# EAGLE board DQ542MA ESP32 (EAGLE 9.4.2)
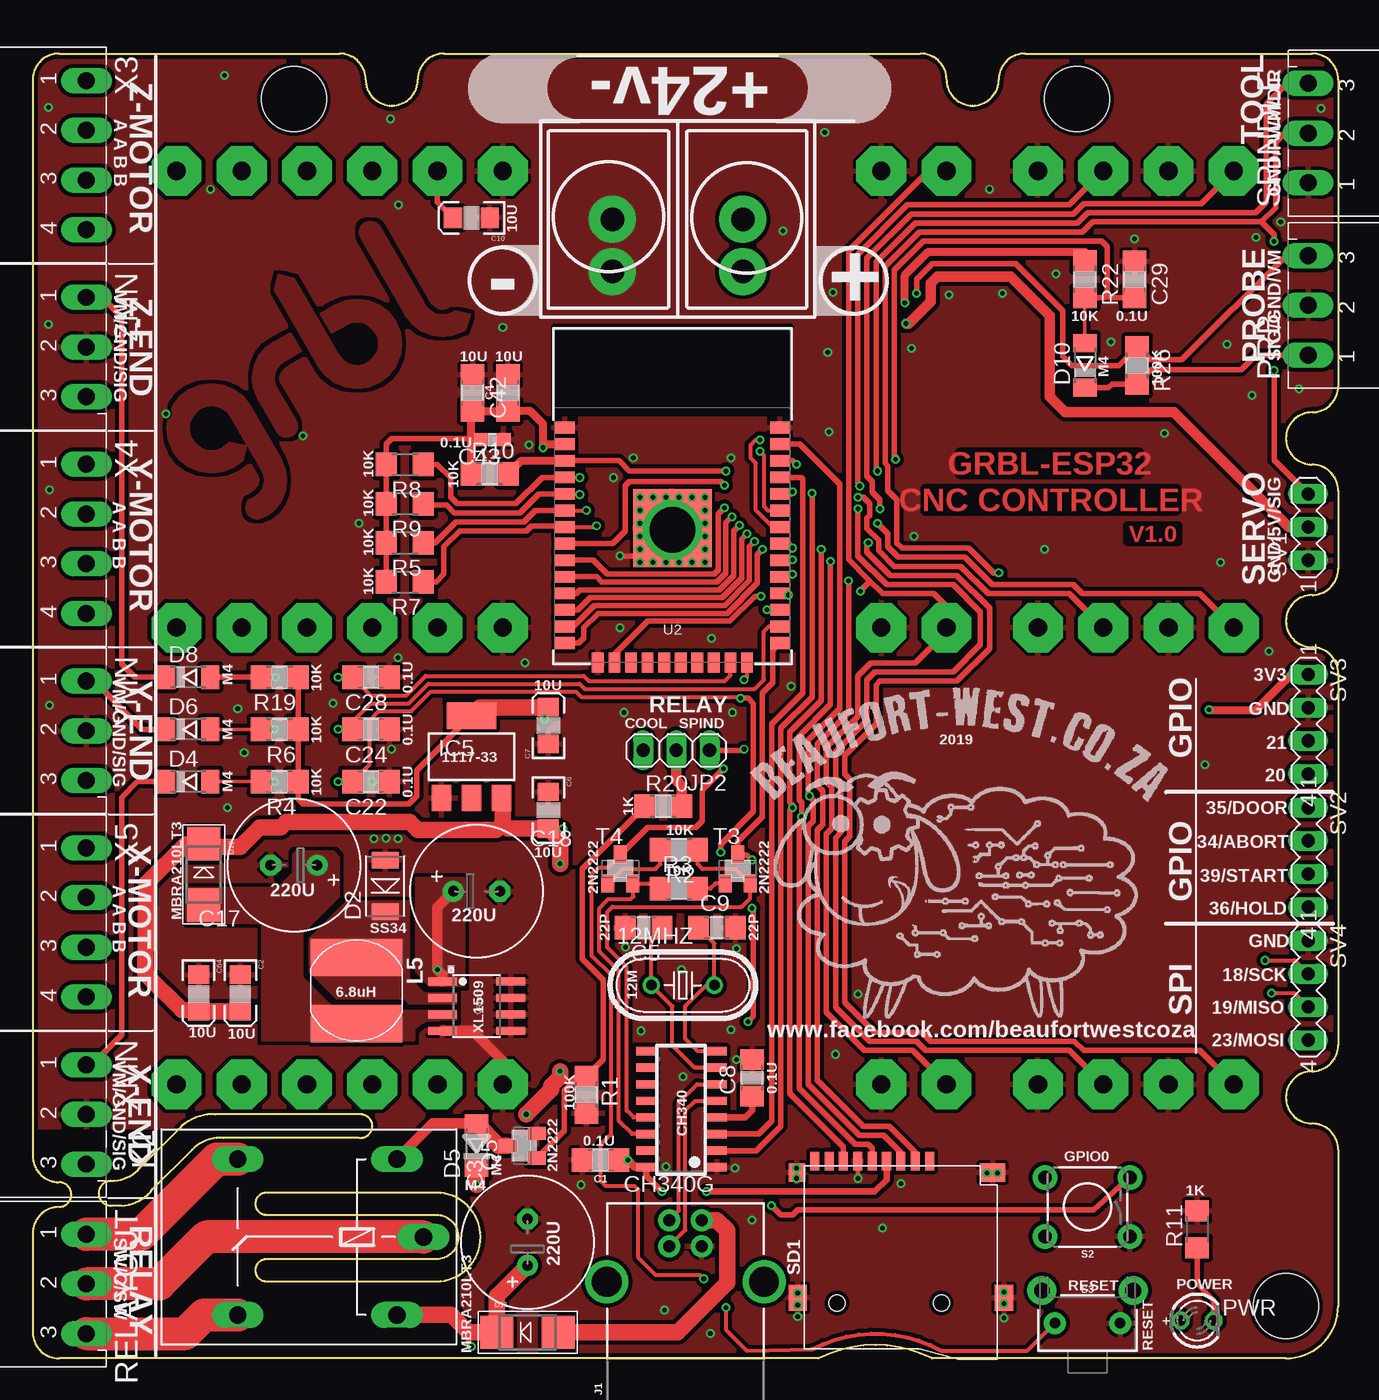
[diagram p0: board, top side]
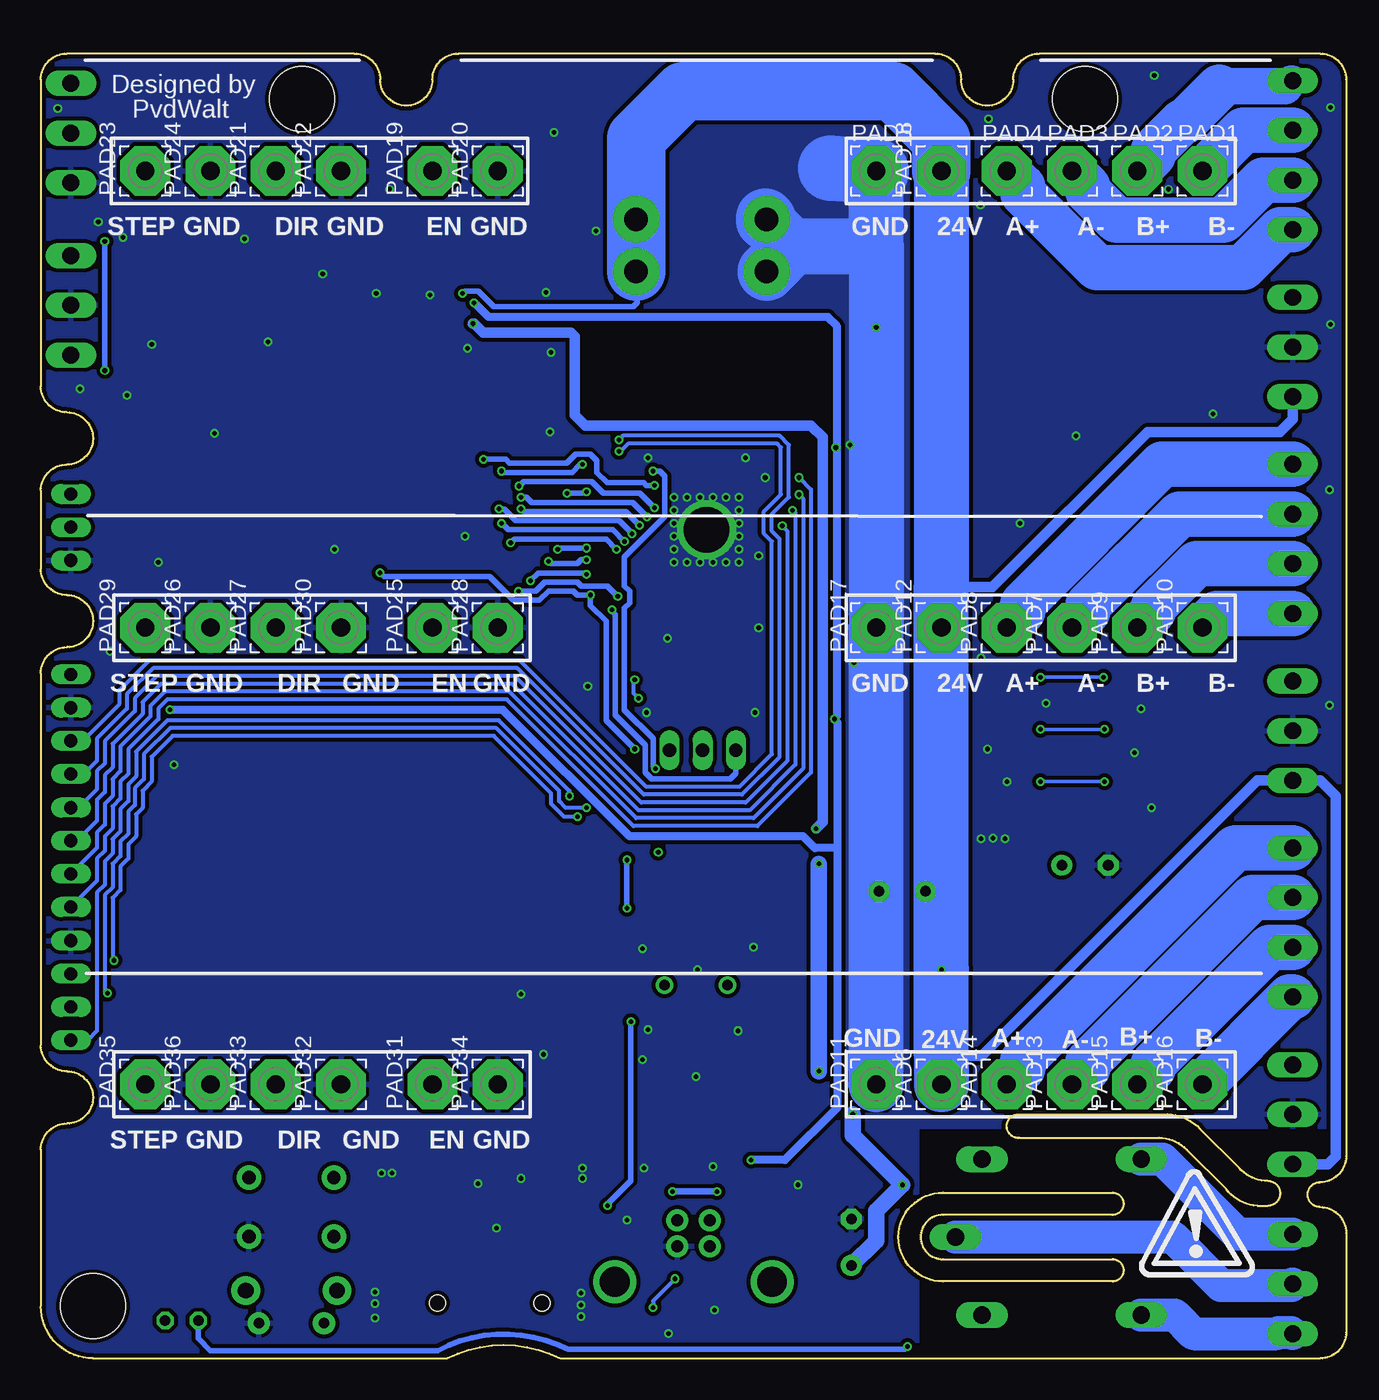
[diagram p1: board, bottom side, seen from below]

Size 100 x 100 mm. Coordinates in mm from the lower left corner, seen from the top.
Outline: 100,98 100,74.5 arc-90 98,72.5 arc90 96,70.5 arc90 98,68.5 arc-90 100,66.5 100,60.5 arc-90 98,58.5 arc90 96,56.5 arc90 98,54.5 arc-90 100,52.5 100,24 arc-90 98,22 arc90 96,20 arc90 98,18 arc-90 100,16 100,4 arc-90 96,0 68.9,0 arc54 60.2,0 2,0 arc-90 0,2 0,9.6 arc-90 2,11.6 arc180 2,13.5 arc-90 0,15.5 0,98 arc-90 2,100 23.5,100 arc-90 25.5,98 arc90 27.5,96 arc90 29.5,98 arc-90 31.5,100 68,100 arc-90 70,98 arc90 72,96 arc90 74,98 arc-90 76,100 98,100 arc-90 100,98
Outline: 17.9,12.7 arc180 17.9,11 30.9,11 arc-180 30.9,7.6 17.9,7.6 arc180 17.9,5.9 30.9,5.9 arc180 30.9,12.7 17.9,12.7
Outline: 6,13.6 arc180 6,11.7 6.8,11.7 arc50 9.2,13 12.2,16 arc-50 14.6,16.9 25,16.9 arc180 25.2,18.7 14,18.7 arc50 11.2,17.6 8.2,14.6 arc-50 6,13.6
Copper layers (1*16): Top 0.035mm / dielectric 1.5mm / Bottom 0.035mm
Design rules "dirt_cheap_dirty_boards.v1": minimum track width 5mil, minimum drill 12mil, track to track 5mil, track to pad 5mil, pad to pad 5mil, via to via 5mil, smd to smd 0mil, copper to edge 10mil, drill to drill 10mil, minimum pad ring 10mil, minimum via ring 6mil, stop-mask expansion 2mil, vias tented up to drill 25mil, thermal gap 10mil
Net classes: 1 power: width 0.6 mm, clearance 0.305 mm; 5 3.3-Amp Class: width 1.27 mm
Holes 5 mm at 20,96.5 80,96.5 96,4
tRestrict: area 40,72.5 to 58,79
bRestrict: area 40,72.5 to 58,79

## Footprints (pad centres in the part's own frame; a part is rotated, then mirrored left to right if it is on the bottom)
HC49U70 = drill 0.813: 1 -2.413,0; 2 2.413,0
1206 = smd 1.6 x 1.8: 1 -1.4,0; 2 1.4,0
EIA3216 = smd 1.4 x 1.6: A 1.4,0; C -1.4,0
E3,5-10 = drill 0.813 pad 1.6: + -1.778,0 | drill 0.813 pad 1.6 octagon: - 1.778,0
C1206 = smd 1.6 x 1.8: 1 -1.4,0; 2 1.4,0
C0603 = smd 1.1 x 1: 1 -0.85,0; 2 0.85,0
DO-214AC = smd 1.27 x 2.1: 1 -1.98,0; 2 1.98,0
SOD80C = smd 1.4 x 1.8: A 1.7,0; C -1.7,0
SOD80 = smd 1.4 x 1.8: 1 -1.7,0; 2 1.7,0
SMADIODE = smd 2.54 x 2.54: A 2.349,0; C -2.349,0
SOT223 = smd 1.5 x 2: 1 -2.3,-3.15; 2 0,-3.15; 3 2.3,-3.15 | smd 3.8 x 2: 4 0,3.15
USB-B-PTH = drill 0.914 pad 1.676: D+ 4,1.25; D- 5.981,1.25; GND 4,-1.25; VBUS 5.981,-1.25 | drill 2.286: SHLD1 1.282,-6.02; SHLD2 1.282,6.02
1X03 = drill 1.016 long: 1 -2.54,0; 2 0,0; 3 2.54,0
G5LE = drill 1.321 long: 1 -7.493,-5.969; 2 -7.493,5.969; O 4.699,5.969; P -9.525,0; S 4.699,-5.969
CD75 = smd 7 x 2.85: 1 0,2.54; 2 0,-2.54
3,81/1,4 = drill 1.397 pad 3.81 octagon: 1 0,0
MC1.5/3-G-3.81 = drill 1.3 long: 1 -3.81,8; 2 0,8; 3 3.81,8
LED3MM = drill 0.813 octagon: A -1.27,0; K 1.27,0
SOT23-BEC = smd 1 x 1.4: B -0.95,-1.1; C 0,1.1; E 0.95,-1.1
R1206 = smd 1.6 x 1.803: 1 -1.422,0; 2 1.422,0
TACTILE_SWITCH_PTH_6.0MM = drill 1.016 pad 1.88: 1 -3.251,2.261; 2 3.251,2.261; 3 -3.251,-2.261; 4 3.251,-2.261
TACTILE_SWITCH_PTH_RIGHT_ANGLE_KIT = drill 0.8 pad 1.7: 1 -2.5,0; 2 2.5,0 | drill 1.2 pad 2.2: ANCHOR1 -3.5,2.5; ANCHOR2 3.5,2.5
TF-PULL = smd 0.7 x 1.4: 1 -2.2,-7.62; 2 -1.1,-7.62; 3 0,-7.62; 4 1.1,-7.62; 5 2.2,-7.62; 6 3.3,-7.62; 7 4.4,-7.62; 8 5.5,-7.62; 9 6.6,-7.62 | smd 1.4 x 2: S1 -7.9,2.85; S2 7.9,2.85 | smd 1.28 x 1.4: S3 7.96,-6.75 | smd 1.95 x 1.4: S4 -7.025,-6.75 | hole 1.25: -3.1,3.25; 4.9,3.25
MA03-1 = drill 1.016 long: 1 -2.54,0; 2 0,0; 3 2.54,0
MA04-1 = drill 1.016 long: 1 -3.81,0; 2 -1.27,0; 3 1.27,0; 4 3.81,0
ESP-WROOM-32-NARROW = smd 0.9 x 1.5: 1 6.43,8.238; 2 5.16,8.238; 3 3.89,8.238; 4 2.62,8.238; 5 1.35,8.238; 6 0.08,8.238; 7 -1.19,8.238; 8 -2.46,8.238; 9 -3.73,8.238; 10 -5,8.238; 11 -6.27,8.238; 12 -7.54,8.238; 13 -8.81,8.238; 14 -10.08,8.238; 25 -10.08,-8.238; 26 -8.81,-8.238; 27 -7.54,-8.238; 28 -6.27,-8.238; 29 -5,-8.238; 30 -3.73,-8.238; 31 -2.46,-8.238; 32 -1.19,-8.238; 33 0.08,-8.238; 34 1.35,-8.238; 35 2.62,-8.238; 36 3.89,-8.238; 37 5.16,-8.238; 38 6.43,-8.238 | smd 1.5 x 0.9: 15 -11.57,5.715; 16 -11.57,4.445; 17 -11.57,3.175; 18 -11.57,1.905; 19 -11.57,0.635; 20 -11.57,-0.635; 21 -11.57,-1.905; 22 -11.57,-3.175; 23 -11.57,-4.445; 24 -11.57,-5.715 | smd 6 x 6: GND -1.27,0
SOIC16 = smd 0.635 x 1.524: 1 -4.445,-2.695; 2 -3.175,-2.695; 3 -1.905,-2.695; 4 -0.635,-2.695; 5 0.635,-2.695; 6 1.905,-2.695; 7 3.175,-2.695; 8 4.445,-2.695; 9 4.445,2.695; 10 3.175,2.695; 11 1.905,2.695; 12 0.635,2.695; 13 -0.635,2.695; 14 -1.905,2.695; 15 -3.175,2.695; 16 -4.445,2.695
SO08 = smd 0.61 x 2.21: 1 -1.905,-2.616; 2 -0.635,-2.616; 3 0.635,-2.616; 4 1.905,-2.616; 5 1.905,2.616; 6 0.635,2.616; 7 -0.635,2.616; 8 -1.905,2.616
MC1.5/4-G-3.81 = drill 1.3 long: 1 -9.525,8; 2 -5.715,8; 3 -1.905,8; 4 1.905,8

## Placement (x,y rotation side)
12MHZ  12MHZ  [HC49U70]  49.8,28.6 0 top
C1  1.0uF  [1206]  43.5,15.2 180 top
C2  10uF  [EIA3216]  15.9,28 270 top
C3  220u 16v  [E3,5-10]  37.9,8.9 90 top
C4  10uF  [1206]  36.4,74 90 top
C5  22P  [C1206]  46.8,33 180 top
C6  10uF  [EIA3216]  39.5,42 270 top
C7  10uF  [EIA3216]  39.5,48.5 90 top
C8  0.1U  [C1206]  55.1,21.5 90 top
C9  22P  [C1206]  52.4,33 0 top
C10  10uF  [EIA3216]  33.6,87.4 180 top
C17  220u 16v  [E3,5-10]  20,37.8 180 top
C18  470u 50v electrolytic  [E3,5-10]  34,35.8 0 top
C22  0.1uF  [C1206]  25.9,44.2 180 top
C24  0.1uF  [C1206]  25.9,48.2 180 top
C28  0.1uF  [C1206]  25.9,52.2 180 top
C29  0.1uF  [C1206]  84.4,82.7 270 top
C42  10uF 50V  [C1206]  33.7,74 270 top
C43  0.1uF 50V  [C0603]  35.2,70.4 180 top
C64  10uF  [EIA3216]  12.7,28 270 top
D2  SS34  [DO-214AC]  27,36.2 90 top
D4  1N4148WS-SOD323  [SOD80C]  11.9,44.2 0 top
D5  M4  [SOD80]  34,16.3 90 top
D6  1N4148WS-SOD323  [SOD80C]  11.9,48.2 0 top
D8  1N4148WS-SOD323  [SOD80C]  11.9,52.2 0 top
D10  1N4148WS-SOD323  [SOD80C]  80.6,76.1 90 top
D11  MBRA210LT3  [SMADIODE]  37.9,2 0 top
D12  MBRA210LT3  [SMADIODE]  13.1,37.1 270 top
IC5  1117-33  [SOT223]  33.6,46.1 0 top
J1  USB_B_PTH  [USB-B-PTH]  50,4.6 90 top
JP2  [1X03]  49.3,46.6 180 top
K2  [G5LE]  20.4,9.3 180 top
L5  68uH  [CD75]  24.8,28.2 180 top
PAD1  [3,81/1,4]  11,91 0 bottom
PAD2  [3,81/1,4]  16,91 0 bottom
PAD3  [3,81/1,4]  21,91 0 bottom
PAD4  [3,81/1,4]  26,91 0 bottom
PAD5  [3,81/1,4]  36,91 0 bottom
PAD6  [3,81/1,4]  31,21 90 bottom
PAD7  [3,81/1,4]  21,56 90 bottom
PAD8  [3,81/1,4]  26,56 90 bottom
PAD9  [3,81/1,4]  16,56 90 bottom
PAD10  [3,81/1,4]  11,56 90 bottom
PAD11  [3,81/1,4]  36,21 90 bottom
PAD12  [3,81/1,4]  31,56 90 bottom
PAD13  [3,81/1,4]  21,21 90 bottom
PAD14  [3,81/1,4]  26,21 90 bottom
PAD15  [3,81/1,4]  16,21 90 bottom
PAD16  [3,81/1,4]  11,21 90 bottom
PAD17  [3,81/1,4]  36,56 90 bottom
PAD18  [3,81/1,4]  31,91 90 bottom
PAD19  [3,81/1,4]  70,91 90 bottom
PAD20  [3,81/1,4]  65,91 90 bottom
PAD21  [3,81/1,4]  82,91 90 bottom
PAD22  [3,81/1,4]  77,91 90 bottom
PAD23  [3,81/1,4]  92,91 90 bottom
PAD24  [3,81/1,4]  87,91 90 bottom
PAD25  [3,81/1,4]  70,56 90 bottom
PAD26  [3,81/1,4]  87,56 90 bottom
PAD27  [3,81/1,4]  82,56 90 bottom
PAD28  [3,81/1,4]  65,56 90 bottom
PAD29  [3,81/1,4]  92,56 90 bottom
PAD30  [3,81/1,4]  77,56 90 bottom
PAD31  [3,81/1,4]  70,21 90 bottom
PAD32  [3,81/1,4]  77,21 90 bottom
PAD33  [3,81/1,4]  82,21 90 bottom
PAD34  [3,81/1,4]  65,21 90 bottom
PAD35  [3,81/1,4]  92,21 90 bottom
PAD36  [3,81/1,4]  87,21 90 bottom
PRB  Phoenix Pluggable 3.81mm 3 way  [MC1.5/3-G-3.81]  105.7,80.7 90 top
PWR  [LED3MM]  89.2,2.9 0 top
Q5  BC849SMD  [SOT23-BEC]  37.5,16.3 90 top
R1  100K  [R1206]  42.4,20.2 270 top
R2  10k  [R1206]  49.5,39 180 top
R3  10k  [R1206]  49.5,36 0 top
R4  10k  [R1206]  18.9,44.2 180 top
R5  10k  [R1206]  28.5,62.5 180 top
R6  10k  [R1206]  18.9,48.2 180 top
R7  10k  [R1206]  28.5,59.5 180 top
R8  10k  [R1206]  28.5,68.5 180 top
R9  10k  [R1206]  28.5,65.5 180 top
R10  10k  [R1206]  35,67.8 0 top
R11  1K  [R1206]  89.2,9.9 90 top
R19  10k  [R1206]  18.9,52.2 180 top
R20  1K  [R1206]  48.3,42.3 0 top
R22  10k  [R1206]  80.6,82.7 270 top
R26  100k  [R1206]  84.6,76.1 270 top
RELAYOUT  Phoenix Pluggable 3.81mm 3 way  [MC1.5/3-G-3.81]  -3.9,5.7 270 top
S2  MOMENTARY-SWITCH-SPST-PTH-6.0MM  [TACTILE_SWITCH_PTH_6.0MM]  80.8,11.6 180 top
S3  MOMENTARY-SWITCH-SPST-PTH-RIGHT-ANGLE-KIT  [TACTILE_SWITCH_PTH_RIGHT_ANGLE_KIT]  80.8,2.7 0 top
SD1  TF-HOLDER  [TF-PULL]  66.5,7.5 180 top
SPINDLE  Phoenix Pluggable 3.81mm 3 way  [MC1.5/3-G-3.81]  105.7,93.9 90 top
SV1  [MA03-1]  97.7,63.7 90 top
SV2  [MA04-1]  97.7,38.4 270 top
SV3  [MA04-1]  97.7,48.6 270 top
SV4  [MA04-1]  97.7,28.2 270 top
T3  [SOT23-BEC]  54,37.5 0 top
T4  [SOT23-BEC]  45,37.5 0 top
U2  ESP-WROOM-32NARROW  [ESP-WROOM-32-NARROW]  49,64.9 90 top
U$2  CH340G  [SOIC16]  49.7,19.1 90 top
VREG1  XL1509  [SO08]  34,27 270 top
X3  Phoenix Pluggable 3.81mm 4 way  [MC1.5/4-G-3.81]  -3.9,88.4 270 top
X4  Phoenix Pluggable 3.81mm 4 way  [MC1.5/4-G-3.81]  -3.9,59 270 top
X5  Phoenix Pluggable 3.81mm 4 way  [MC1.5/4-G-3.81]  -3.9,29.6 270 top
XMN  Phoenix Pluggable 3.81mm 3 way  [MC1.5/3-G-3.81]  -3.9,18.7 270 top
YMN  Phoenix Pluggable 3.81mm 3 way  [MC1.5/3-G-3.81]  -3.9,48.1 270 top
ZMN  Phoenix Pluggable 3.81mm 3 way  [MC1.5/3-G-3.81]  -3.9,77.5 270 top

## Library data of the parts
12MHZ = crystal; OC_FARNELL: unknown; OC_NEWARK: unknown
C1 = SparkFun-Capacitors; PROD_ID: CAP-09822
C2 C6 C7 C10 C64 = SparkFun
C3 C5 C8 C9 C17 C18 C22 C24 C28 C29 = rcl
C4 = SparkFun-Capacitors; PROD_ID: CAP-10057
C42 C43 R2-R9 R19 R22 R26 = resistor
D2 = dp_devices
D4 D6 D8 D10 = diode
D5 = semicon-smd-ipc
D11 D12 = microbuilder
IC5 = v-reg
J1 = SparkFun-Connectors; PROD_ID: CONN-08278; SF_ID: PRT-00139
JP2 = pinhead
K2 = relay; OC_FARNELL: unknown; OC_NEWARK: unknown
L5 = rc-master-smd
PAD1-PAD36 = wirepad
PRB RELAYOUT SPINDLE X3-X5 XMN YMN ZMN = jt-con-phoenix-3.81
PWR = led
Q5 = transistor-npn
R1 R10 R11 R20 = adafruit
S2 = SparkFun-Switches; PROD_ID: SWCH-08441; SF_SKU: COM-00097
S3 = SparkFun-Switches; PROD_ID: CONN-10672; SF_SKU: COM-10791
SD1 = sd-mmc
SV1-SV4 = con-lstb; OC_FARNELL: unknown; OC_NEWARK: unknown
T3 T4 = transistor
U2 = SparkFun-RF; PROD_ID: IC-13849
U$2 = usb-serial
VREG1 = Cohesion_parts

## Nets
0: S2.3 T3.C U2.25
3.3V: C1.1 C4.1 C7.A C42.2 C43.2 IC5.4 R4.1 R5.2 R6.1 R7.2 R8.2 R9.2 R10.1 R19.1 R22.1 SD1.4 SV3.1 U2.2 U$2.16
5_SS_SD: SD1.2 U2.29
5V: C2.A C3.+ C6.A C64.A D5.1 D11.C D12.C IC5.3 K2.2 PWR.A SV1.2
5V-REG: C17.+ D12.A L5.1 VREG1.3
18_SCLK: SD1.5 SV4.2 U2.30
19_MISO: SD1.7 SV4.3 U2.31
20: SV3.4 U2.32
21: SV3.3 U2.33
23_MOSI: SD1.3 SV4.4 U2.37
24V: C10.A C18.+ PAD6.1 PAD12.1 PAD18.1 PRB.3 R26.1 VREG1.1 XMN.3 YMN.3 ZMN.3
C: K2.P RELAYOUT.2
CHIP_PU: R10.2 S3.1 T4.C U2.3
COIL-: D5.2 K2.1 Q5.C
COOLANT_16: JP2.3 U2.27
CYCLESTART_39: R9.1 SV2.3 U2.5
D+: J1.D+ U$2.5
D-: J1.D- U$2.6
DOOR_35: R7.1 SV2.1 U2.7
DTR: R2.1 T3.E U$2.13
ENABLE_13: PAD19.1 PAD25.1 PAD31.1 U2.16
FEEDHOLD_36: R8.1 SV2.4 U2.4
GND: C1.2 C2.C C3.- C4.2 C5.2 C6.C C7.C C8.2 C9.2 C10.C C17.- C18.- C22.1 C24.1 C28.1 C29.1 C42.1 C43.1 C64.C D2.2 IC5.1 J1.GND PAD5.1 PAD11.1 PAD17.1 PAD20.1 PAD22.1 PAD24.1 PAD26.1 PAD28.1 PAD30.1 PAD32.1 PAD34.1 PAD36.1 PRB.2 Q5.E R1.2 R11.2 S2.1 S3.2 SD1.6 SD1.S1 SD1.S2 SD1.S3 SD1.S4 SPINDLE.1 SV1.1 SV3.2 SV4.1 U2.1 U2.15 U2.38 U2.GND U$2.1 VREG1.4 VREG1.5 VREG1.6 VREG1.7 VREG1.8 XMN.2 YMN.2 ZMN.2
N$2: R2.2 T4.B
N$3: R3.2 T3.B
N$6: PAD10.1 X4.4
N$8: PAD8.1 X4.1
N$9: 12MHZ.1 C5.1 U$2.7
N$10: PAD7.1 X4.2
N$11: 12MHZ.2 C9.1 U$2.8
N$13: PAD2.1 X3.1
N$14: PAD1.1 X3.2
N$15: PAD14.1 X5.1
N$16: PAD13.1 X5.2
N$18: PWR.K R11.1
N$32: PAD4.1 X3.4
N$35: PAD3.1 X3.3
N$38: PAD9.1 X4.3
N$40: PAD16.1 X5.4
N$42: Q5.B R1.1 R20.1
N$43: PAD15.1 X5.3
N$292: D2.1 L5.2 VREG1.2
NC: K2.S RELAYOUT.1
NO: K2.O RELAYOUT.3
PROBE_32: C29.2 D10.A R22.2 U2.8
PROBE_HV: D10.C PRB.1 R26.2
RELAY: JP2.2 R20.2
RESET/ABORT_34: R5.1 SV2.2 U2.6
RTS: R3.1 T4.E U$2.14
RX: U2.35 U$2.3
SPINDLE_17: JP2.1 SPINDLE.2 SV1.3 U2.28
SPINDLE_EN_22: SPINDLE.3 U2.36
TX: U2.34 U$2.2
V3: C8.1 U$2.4
VUSB: D11.A J1.VBUS
X_MIN_2: C22.2 D4.A R4.2 U2.24
X_MIN_HV: D4.C XMN.1
XDIR_26: PAD33.1 U2.11
XSTEP_12: PAD35.1 U2.14
Y_MIN_4: C24.2 D6.A R6.2 U2.26
Y_MIN_HV: D6.C YMN.1
YDIR_25: PAD27.1 U2.10
YSTEP_14: PAD29.1 U2.13
Z_MIN_15: C28.2 D8.A R19.2 U2.23
Z_MIN_HV: D8.C ZMN.1
ZDIR_33: PAD21.1 U2.9
ZSTEP_27: PAD23.1 U2.12

## Tracks (layer width: path | path; a pad name or v marks a point on that pad's centre or on a via)
0  (via drill 0.35)
  Top 0.406: U2.25 56.7,54.28 56.7,51.8 55.9,51 55.9,41.5 54,39.6 T3.C 54.7,38.6 v55.1,38.2 | v55.1,34.5 55.2,34.4 55.2,26.2 v54.8,25.8 | v56.6,11.7 57.3,11 58.2,11 58.6,11.4 81.29,11.4 S2.3
  Bottom 0.406: v55.1,38.2 v55.1,34.5 | v54.8,25.8 54.8,13.6 56.6,11.8 v56.6,11.7
3.3V  (via drill 0.35)
  Top 0.305: U$2.16
  Top 0.406: 80.52,84.2 R22.1 | IC5.4 29.4,45.05 29.4,43.1 28.8,42.5 20.7,42.5 20.32,42.88 R4.1 R6.1 R19.1 | 33.58,70.5 27.5,70.5 27.08,70.08 R8.2 R9.2 R5.2 R7.2
  Top 0.508: SD1.4 65.4,13.7 64.5,12.8 v51.6,12.8 | v48.2,12.8 47,14 U$2.16
  Top 0.61: U$2.16 46.15,14.65 v45.6,15.2 C1.1 | C7.A 39.2,49.6 v39.2,49 | U2.2 39.36,70.06 v39.1,69.8 39.1,71.6 38.1,72.6 C4.1 C42.2 33.58,72.48 33.58,70.5 33.58,70.3 | R10.1 33.58,70.3 | C43.2 34.25,70.3 33.58,70.3 | v66.8,80.9 66.8,83 68.6,84.8 80.6,84.8 80.6,84.28 80.52,84.2 | v90.1,49.7 93.7,49.7 96.41,52.41 SV3.1
  Top 1.27: IC5.4 34.25,49.9 C7.A
  Bottom 0.508: v51.6,12.8 v48.2,12.8
  Bottom 0.61: v45.6,15.2 43,15.2 39,19.2 39,39.1 | 39,39.1 39,48.8 v39.2,49 39,49.2 39,69.7 v39.1,69.8 39,69.9 39,79.1 39.7,79.8 65.7,79.8 v66.8,80.9 | 39,39.1 40.7,39.1 41.6,40 54.9,40 64.6,49.7 v90.1,49.7
5_SS_SD  (via drill 0.35)
  Top 0.406: SD1.2 67.6,15.8 65.6,17.8 63.6,17.8 60.1,21.3 60.1,40.5 60.5,40.9 60.5,43.5 60.1,43.9 60.1,47.1 62.5,49.5 v62.5,59.6 | v58.2,60.1 57.44,60.1 U2.29
  Bottom 0.406: v58.2,60.1 58.3,60.2 61.9,60.2 v62.5,59.6
5V  (via drill 0.35)
  Top 0.406: C6.A v40.6,40.6 | v33.6,0.9 33.4,1.1 33.4,2
  Top 0.813: v66.9,79.3 67.1,79.3 68.8,81 68.8,82.4 69.3,82.9 74.9,82.9 77.9,79.9 77.9,73.7 79.1,72.5 87.4,72.5 96.2,63.7 SV1.2
  Top 1.27: 13.05,39.4 D12.C | 13.05,39.4 11.7,39.4 8.69,36.39 8.62,29.48 11.4,26.7 11.5,26.7 C64.A C2.A | 13.05,39.4 13.25,39.2 15.9,39.2 17.4,40.7 19,40.7 19.42,41.12 28.88,41.12 29.5,40.5 35.5,40.5 36,41 | K2.2 32.07,3.33 33.4,2 34.7,2 34.8,2.1 35.45,2.1 D11.C 35.55,4.77 C3.+ | D5.1 v34,13.3 | 36,41 36,42.85 IC5.3 | 36,41 36.4,40.6 C6.A 40.4,39.7 v40.4,37.9 | v40.4,22 40.4,21.57 39.73,20.9 39.73,20.64 v37.8,18.7
  Bottom 0.406: PWR.A 87.93,1.53 87,0.6 69.6,0.6 arc55 59.6,0.7 33.8,0.7 v33.6,0.9
  Bottom 0.813: v40.6,40.6 40.1,41.1 40.1,70.6 41,71.5 58.3,71.5 59.1,72.3 59.1,78.3 59.4,78.6 66.1,78.6 66.8,79.3 v66.9,79.3
  Bottom 1.27: v40.4,37.9 v40.4,22 | v37.8,18.7 37.8,17.1 v34,13.3 36,11.3 36,9.02 C3.+
5V-REG
  pour Top (isolate 0.406, no thermals): 32.4,26.6 23.2,26.6 20.6,29.2 20.6,32.6 23.4,35.4 23.4,38.4 23,38.8 20.2,38.8 20,38.6 20,37.2 18.8,36 11.9,36 11.8,35.9 11.8,33.6 12,33.4 17.6,33.4 17.6,24.4 29.2,24.4 29.2,25.2 29.8,25.8 32.4,25.8
18_SCLK  (via drill 0.35)
  Top 0.305: v94.4,30.5 96.67,30.5 SV4.2
  Top 0.406: SD1.5 64.3,16.1 64,16.4 63,16.4 58.7,20.7 58.7,41.1 58.9,41.3 v58.9,41.5 58.9,42.6 58.7,42.8 58.7,47.7 61.1,50.1 v61.1,61.1 | U2.30 58.17,61.17 v58.2,61.2
  Bottom 0.305: v58.9,41.5 59.9,41.5 60.9,42.5 60.9,43.3 65.3,47.7 89.9,47.7 91.5,46.1 91.5,44.2 92.2,43.5 92.2,42.2 92.7,41.7 92.7,40 93.3,39.4 93.3,38.3 93.9,37.7 93.9,35.9 94.5,35.3 94.5,30.6 v94.4,30.5
  Bottom 0.406: v58.2,61.2 58.6,61.2 58.9,60.9 60.9,60.9 v61.1,61.1
19_MISO  (via drill 0.35)
  Top 0.305: v94.9,28 96.63,28 SV4.3
  Top 0.406: SD1.7 62.1,16.2 58,20.3 58,42 v58.2,42.2 58.2,42.4 58,42.6 58,48 60.4,50.4 v60.4,62 | U2.31 57.86,62.44 v58.2,62.1
  Bottom 0.305: v58.2,42.2 59.8,42.2 60.3,42.7 60.3,43.5 65.1,48.3 90.1,48.3 92.1,46.3 92.1,44.4 92.8,43.7 92.8,42.4 93.3,41.9 93.3,40.2 93.9,39.6 93.9,38.5 94.5,37.9 94.5,36.1 95.1,35.5 95.1,28.2 v94.9,28
  Bottom 0.406: v60.4,62 60.3,62.1 v58.2,62.1
20  (via drill 0.35)
  Top 0.305: U2.32 56.69,63.71 55.4,65 55.4,68.6 55,69 55,70 55.4,70.4 v55.7,70.4
  Bottom 0.305: v55.7,70.4 55.4,70.7 43.4,70.7 42.7,70 42.7,66 44,64.7 44,63.4 43.4,62.8 43.4,46.1 46.3,43.2 53.8,43.2 63.5,52.9 91.4,52.9 93.4,50.9 93.4,49.8 95.7,47.5 95.7,45.8 96.71,44.79 SV3.4
21  (via drill 0.35)
  Top 0.305: v55.7,69.5 56,69.2 56,65.3 56.32,64.98 U2.33
  Bottom 0.305: v55.7,69.5 55.6,69.5 55,70.1 43.6,70.1 43.3,69.8 43.3,66.2 44.6,64.9 44.6,63.2 44,62.6 44,46.3 46.5,43.8 53.6,43.8 63.3,53.5 91.7,53.5 94,51.2 94,50.1 96.77,47.33 SV3.3
23_MOSI  (via drill 0.35)
  Top 0.406: SD1.3 66.5,15.8 65.2,17.1 63.3,17.1 59.4,21 59.4,40.8 59.8,41.2 59.8,42.8 v59.5,43.1 59.4,43.2 59.4,47.4 61.8,49.8 61.8,67 58.74,70.06 U2.37
  Bottom 0.305: v59.5,43.1 59.5,43.5 64.9,48.9 90.3,48.9 92.7,46.5 92.7,44.6 93.3,44 93.3,42.7 93.9,42.1 93.9,40.4 94.5,39.8 94.5,38.7 95.1,38.1 95.1,36.3 95.7,35.7 95.7,25.1 96.41,24.39 SV4.4
24V  (via drill 0.35, 1.8 pad 3.6)
  Top 0.406: PRB.3 97.59,84.4 95.9,84.4 88.02,76.52 85.6,76.52 R26.1 83.18,76.1 79.6,76.1 78.9,76.8 78.9,80.3 75.3,83.9 68.9,83.9 67.7,82.7 v67.7,81.6 | C10.A 31,88.6 PAD18.1
  Top 0.813: VREG1.1 31.38,29.42 v31,29.8 31,34.58 C18.+
  Bottom 0.406: v67.7,81.6 67.5,81.8 66.5,81.8 65.3,80.6 54.6,80.6 54.3,80.9 54.3,83.2 v54.4,83.3
  Bottom 0.813: ZMN.3 4.1,72 5.1,71 15.2,71 27.1,59.1 30.85,59.1 31,59.25 | 31,23.2 27.9,23.2 6.81,44.29 YMN.3 1.99,44.29 0.8,43.1 0.8,15.5 1.41,14.89 XMN.3
  Bottom 4.2: PAD6.1 31,23.2 v31,29.8 PAD12.1 31,59.25 PAD18.1
  Bottom 4.5: PAD18.1 31,93.4 34.7,97.1 50.8,97.1 54.4,93.5 v54.4,87.3 v54.4,83.3
  pour Top (isolate 0.406, no thermals): 33,28.6 30.4,28.6 29.4,29.6 29.4,36.8 33,36.8
C
  Top 2.54: K2.P 13.3,9.3 9.7,5.7 RELAYOUT.2
  Bottom 2.54: K2.P 13.3,9.3 9.6,5.6 4.2,5.6 RELAYOUT.2
CHIP_PU  (via drill 0.35)
  Top 0.305: T4.C 44,37.6 43.3,37.6 42.8,37.1 42.8,30.9 44.3,29.4 44.3,17.2 43.5,16.4 43.5,13.6 43.9,13.2 46.1,13.2 46.4,12.9 46.4,7.7 47.7,6.4 51.1,6.4 v51.4,6.1 | v53.1,3.9 53.1,2.2 54.7,0.6 59.7,0.7 arc-57 69.6,0.6 76.2,0.6 S3.1
  Top 0.406: U2.3 44.91,68.79 45.7,68 v53.1,68 | v52.91,45.19 51.3,43.58 51.3,41.2 50.8,40.7 47.1,40.7 T4.C
  Top 0.61: R10.2 37.41,68.79 U2.3
  Bottom 0.305: v51.4,6.1 53.1,4.4 v53.1,3.9
  Bottom 0.406: v53.1,68 52.6,68 52.2,67.6 52.2,64.5 55.3,61.4 55.3,59.2 54.9,58.8 54.9,57.9 55.3,57.5 55.3,49.7 53.1,47.5 53.1,45.38 v52.91,45.19
COIL-
  Top 0.813: D5.2 30.62,18 K2.1
  Top 1.27: Q5.C 35.7,16.3 D5.2
COOLANT_16  (via drill 0.35)
  Top 0.406: v56.24,57.36 U2.27
  Bottom 0.406: v56.24,57.36 56.24,57.26 56,57.02 56,49.3 53.7,47 53.7,44.9 53.2,44.4 47.2,44.4 46.76,44.84 JP2.3
CYCLESTART_39  (via drill 0.35)
  Top 0.305: U2.5 41.85,66.25 v41.9,66.2
  Top 0.406: U2.5 38.75,66.25 37.3,64.8 32.3,64.8 31.7,65.4 30.02,65.4 R9.1
  Bottom 0.305: v41.9,66.2 41.6,65.9 41.6,45.2 45.4,41.4 54.4,41.4 64.1,51.1 90.5,51.1 91.6,50 91.6,49.2 93.9,46.9 93.9,45 94.5,44.4 94.5,43.1 95.1,42.5 95.1,40.9 95.7,40.3 95.7,39.13 SV2.3
D+
  Top 0.305: J1.D+ 50,9.85 50,19 50.73,19.73 U$2.5
D-
  Top 0.305: J1.D- 49.5,11.33 49.5,19.61 50.89,21 U$2.6
DOOR_35  (via drill 0.35)
  Top 0.305: U2.7 43.11,63.71 v43.2,63.8
  Top 0.406: R7.1 30.9,59.5 31.5,60.1 31.5,62.2 32.7,63.4 37.8,63.4 38.2,63.8 40.67,63.8 U2.7
  Bottom 0.305: v43.2,63.8 42.8,63.4 42.8,45.8 46,42.6 54,42.6 63.7,52.3 91.1,52.3 92.8,50.6 92.8,49.6 95.1,47.3 95.1,45.6 95.7,45 95.7,43.6 97.09,42.21 SV2.1
DTR
  Top 0.305: U$2.13 46.03,18.46 45.5,19 45.5,30 44,31.5 44,34.2 44.4,34.6 54.3,34.6 54.95,35.25 T3.E 53.85,37.5 51.3,37.5 50.92,37.88 R2.1
ENABLE_13  (via drill 0.35)
  Top 0.406: PAD31.1 67.4,23.6 63.7,23.6 60.8,26.5 60.8,40.2 61.2,40.6 61.2,43.8 60.8,44.2 60.8,46.8 63.2,49.2 63.2,52.3 64.2,53.3 67.6,53.3 70,55.7 PAD25.1 70,57.6 69,58.6 65.1,58.6 64.05,59.65 | 64.05,59.65 62.5,61.2 62.5,84.9 68.6,91 PAD19.1 | v63.4,58.8 64.05,59.45 64.05,59.65 | v55.8,58.4 55.3,58.4 53.4,56.5 47.1,56.5 44.55,53.95 U2.16
  Bottom 0.406: v55.8,58.4 56.6,59.2 58.6,59.2 58.9,59.5 61.4,59.5 62.1,58.8 v63.4,58.8
FEEDHOLD_36  (via drill 0.35)
  Top 0.305: U2.4 41.88,67.52 v41.9,67.5
  Top 0.406: R8.1 31,68.5 32,67.5 32,66 32.5,65.5 37,65.5 39.02,67.52 U2.4
  Bottom 0.305: v41.9,67.5 41,66.6 41,44.9 45.1,40.8 54.6,40.8 64.3,50.5 90.3,50.5 91,49.8 91,49 93.3,46.7 93.3,44.8 93.9,44.2 93.9,42.9 94.5,42.3 94.5,40.6 95.1,40 95.1,38.9 95.7,38.3 95.7,36.59 SV2.4
GND  (via drill 0.35, 1.8 pad 3.6, 3.5)
  Top 0.305: SD1.6 v63.2,13.8
  Top 0.406: U2.GND 49,61.5 v45,61.5
  Top 0.508: v53.9,22.9 C8.2 | SD1.S3 58.5,14.29 v58.5,14.6 | v73.9,14.2 73.85,14.25 SD1.S4 | SD1.S1 74.5,4.75 74.5,5 v74.4,5.1 | SD1.S2 v58.6,5
  Top 0.813: VREG1.4 33.7,25.09 36,22.8 PAD11.1
  Bottom 4.2: PAD11.1 PAD17.1 36,85.2 PAD5.1
  Bottom 4.3: 36,85.2 42.5,85.2 44.5,87.2
  Bottom 4.5: 44.5,87.4 v44.4,87.3 44.5,87.2 | 42.5,85.2 v44.4,83.3
  Bottom 5: PAD5.1 39.5,91.2
  other vias: 27.07,39.88 26.15,39.83 27.98,39.84 25.98,44.2 1.21,95.85 1.19,79.25 1.29,66.55 1.29,50.04 57.47,86.4 25,64 27.48,46.7 27.98,53.7 46.5,61 47.5,61 48.5,61 49.5,61 50.5,61 51.5,61 51.5,62 51.5,63 51.5,64 51.5,65 51.5,66 50.5,66 49.5,66 48.5,66 47.5,66 46.5,66 46.5,65 46.5,64 46.5,63 46.5,62 49,63.5 44.5,67.5 46,69 67.5,63 52,55.2 45.3,49.5 14.9,42.2 15.7,49.8 16.2,46.4 23,50.2 28,88.4 27.4,95 61.3,81.7 82.6,77.9 84.4,85.8 63.2,27.9 61.5,23.3 51.9,1.9 48.4,3.7 42,13.3 53.8,14.6 93.4,73.8 97,74.3 86.7,70.9 60.9,77.1 70.2,81.5 73.3,89.6 73.1,14.2 74.4,4.2 58.6,4.1 58.5,13.8 78.4,83.1 38,70 36,79 66.5,13.4 94.7,54.2 13.6,89.6 53.9,31.4 45.4,31.5 49.7,29.8 45,56 37.7,53.3 55.1,10.6 58.6,3.2 74.4,3.1 65.1,10 58.1,51.5 67.3,77.4 74.3,81.6 95.6,87.1 98.7,95.8 49.8,21.6 46.6,25.1 53.5,25.2 48.5,14.7 93.7,85.9 91.5,77.7 60.67,93.95 77.5,62 91,61 53.5,69 61,71 14.7,98.3 10.2,72.4 20.7,70.7 53.6,49.5 89.8,45.5
  pour Bottom (isolate 0.305, rank 6): 0,100 100,100 100,0 32.9,0 32.9,17.8 0,17.8
  pour Top (isolate 0.305, rank 6): 0,100 100,100 100,0 32.92,0 32.92,17.74 0,17.74
N$1
  pour Top: 17.87,64.54 17.51,64.39 17.31,64.34 17.11,64.33 16.91,64.37 16.72,64.46 16.57,64.59 16.44,64.76 16.36,64.95 16.33,65.15 16.35,65.35 16.41,65.55 16.52,65.72 16.66,65.86 17.02,66.01 17.33,66.25 17.56,66.55 17.71,66.91 17.76,67.29 17.71,67.68 17.56,68.04 15.19,72.14 14.92,72.5 14.56,72.78 14.14,72.95 13.69,73.01 13.25,72.95 12.83,72.78 12.47,72.5 12.2,72.14 12.03,71.73 11.97,71.28 12.03,70.83 12.2,70.42 12.47,70.06 12.83,69.78 13.25,69.61 13.69,69.55 14.14,69.61 14.56,69.78 14.92,70.06 15.03,70.2 16.34,69.94 16.12,68.86 15.95,68.73 15.41,68.31 15.12,68.19 14.58,67.97 13.69,67.86 13.18,67.92 12.81,67.97 11.98,68.31 11.27,68.86 10.73,69.57 10.39,70.39 10.27,71.28 10.39,72.17 10.73,72.99 11.27,73.7 11.98,74.25 12.81,74.59 13.69,74.7 14.58,74.59 15.41,74.25 16.12,73.7 16.66,72.99 19.03,68.88 19.35,68.12 19.46,67.29 19.35,66.47 19.03,65.71 18.53,65.05
N$2
  Top 0.305: T4.B 45.15,37.5 47.7,37.5 48.08,37.88 R2.2
N$3
  Top 0.305: T3.B 52.3,36.4 51.9,36 R3.2
N$5
  pour Top: 18.71,74.37 20.17,71.84 20.25,71.64 20.28,71.43 20.25,71.21 20.17,71.01 20.04,70.84 19.86,70.71 19.66,70.62 19.45,70.59 19.23,70.62 19.03,70.71 18.86,70.84 18.73,71.01 17.19,73.67 16.91,74.42 16.82,75.23 16.95,76.03 17.29,76.77 17.8,77.4 18.46,77.88 19.74,78.62 20.57,77.17 19.17,76.36 18.88,76.12 18.66,75.82 18.52,75.46 18.49,75.09 18.55,74.72
N$6
  Bottom 3.5: X4.4 9.9,57.09 PAD10.1
N$7
  pour Top: 20.01,82.8 23.4,76.92 23.66,76.58 24.01,76.31 24.41,76.15 24.84,76.09 25.27,76.15 25.67,76.31 26.02,76.58 26.28,76.92 26.45,77.33 26.51,77.76 26.45,78.19 26.28,78.59 26.02,78.93 25.67,79.2 25.27,79.36 24.84,79.42 24.41,79.36 24.01,79.2 22.89,78.55 22.01,80.08 23.13,80.72 23.95,81.06 24.84,81.18 25.73,81.06 26.55,80.72 27.26,80.18 27.81,79.47 28.15,78.64 28.27,77.76 28.15,76.87 27.81,76.04 27.26,75.34 26.55,74.79 25.73,74.45 24.84,74.33 23.95,74.45 23.13,74.79 22.42,75.34 21.88,76.04 18.48,81.92 18.82,83.1
N$8
  Bottom 3.5: PAD8.1 24.78,57.22 24.78,57.83 14.08,68.53 X4.1
N$9
  Top 0.305: U$2.7 50.73,22.27 49,24 49,26.99 12MHZ.1 47.39,32.19 C5.1
N$10
  Bottom 3.5: PAD7.1 19.78,57.22 19.78,57.7 12.76,64.72 X4.2
N$11
  Top 0.305: U$2.8 50.95,23.55 50,24.5 50,27 51.6,28.6 12MHZ.2 52.21,31.79 C9.1
N$12
  pour Top: 32.35,80.3 33.55,80.04 33.18,78.87 33,78.73 32.22,78.41 31.38,78.3 30.54,78.41 29.76,78.73 29.09,79.25 28.58,79.92 25.14,85.87 25.06,86.08 25.03,86.29 25.06,86.51 25.14,86.71 25.27,86.89 25.45,87.02 25.65,87.1 25.87,87.13 26.08,87.1 26.29,87.02 26.46,86.89 26.59,86.71 29.94,80.91 30.04,80.74 30.15,80.56 30.44,80.28 30.8,80.07 31.2,79.97 31.61,79.98 32,80.09
N$13
  Bottom 2.3: X3.1 4.28,97.92 4.7,97.5
  Bottom 2.8: 4.7,97.5 9.63,97.5 9.71,97.42
  Bottom 3.5: 9.71,97.42 12.35,94.78 12.57,94.78 14.78,92.57 14.78,92.22 PAD2.1
N$14
  Bottom 3.5: X3.2 7.88,94.11 PAD1.1
N$15
  Bottom 3.5: PAD14.1 24.78,22.22 24.78,22.82 8.48,39.12 X5.1
N$16
  Bottom 3.5: PAD13.1 19.78,22.22 19.78,22.7 7.16,35.31 X5.2
N$18
  Top 0.406: PWR.K 90.47,4.43 89.2,5.7 R11.1
N$32
  Bottom 3.5: X3.4 5.03,86.5 7.93,83.59 19.07,83.59 24.78,89.3 24.78,89.78 PAD4.1
N$35
  Bottom 3.5: PAD3.1 19.78,89.78 19.78,89.43 17.57,87.22 9.43,87.22 6.35,90.31 X3.3
N$38
  Bottom 3.5: PAD9.1 14.78,57.22 14.78,57.57 11.44,60.91 X4.3
N$40
  Bottom 3.5: X5.4 4.3,27.7 PAD16.1
N$42
  Top 0.406: R20.1 42.1,37.52 42.1,30.6 43.7,29 43.7,22.92 42.54,21.76 | 42.54,21.76 R1.1 | Q5.B 40.7,17.45 40.7,20.5 41.96,21.76 42.54,21.76
N$43
  Bottom 3.5: PAD15.1 14.78,22.22 14.78,22.57 5.84,31.5 X5.3
N$292
  pour Top (isolate 0.406, rank 2, no thermals): 32.4,27.2 23.4,27.2 21.2,29.4 21.2,32.4 23.8,35 28.8,35 28.8,29.4 30.2,28 32.4,28
NC
  Top 2.54: K2.S 14.07,15.27 8.3,9.5 RELAYOUT.1
  Bottom 2.54: RELAYOUT.1 8.31,9.51 14.07,15.27 K2.S
NO
  Top 2.54: RELAYOUT.3 11.69,1.89 13.13,3.33 K2.O
  Bottom 2.54: K2.O 13.13,3.33 11.7,1.9 5.3,1.9 5.2,2 4.21,2 RELAYOUT.3
PROBE_32  (via drill 0.35)
  Top 0.254: R22.2 D10.A
  Top 0.406: U2.8 44.44,62.44 45.4,63.4 45.4,66.9 45.7,67.2 52.7,67.2 v53,66.9 | v66.1,68.9 66.1,69.1 66,69.2 66,83.4 68.2,85.6 81.9,85.6 82.3,85.2 82.3,81.46 | 82.3,81.46 82.48,81.28 84.38,81.28 C29.2 | R22.2 82.12,81.28 82.3,81.46
  Bottom 0.406: v53,66.9 53.6,66.9 53.8,67.1 56.6,67.1 57.4,67.9 57.4,68.8 57.9,69.3 59,69.3 59.7,68.6 64.1,68.6 64.4,68.9 v66.1,68.9
PROBE_HV
  Top 0.406: D10.C 82.4,74.4 82.68,74.68 R26.2 85.7,75.78 92.58,75.78 93.69,76.89 PRB.1
RELAY
  Top 0.813: R20.2 49.72,43.88 49.3,44.3 JP2.2
RESET/ABORT_34  (via drill 0.35)
  Top 0.305: U2.6 42.38,64.98 v42.4,65
  Top 0.406: R5.1 30.8,62.5 32.4,64.1 37.6,64.1 38.48,64.98 U2.6
  Bottom 0.305: v42.4,65 42.2,64.8 42.2,45.5 45.7,42 54.2,42 63.9,51.7 90.8,51.7 92.2,50.3 92.2,49.4 94.5,47.1 94.5,45.3 95.1,44.7 95.1,43.4 95.7,42.8 95.7,41.2 97.23,39.67 SV2.2
RTS
  Top 0.305: U$2.14 45.91,17.2 44.9,18.2 44.9,29.7 43.4,31.2 43.4,34.5 44.1,35.2 45.8,35.2 46,35.4 46,36.35 T4.E 47.68,36.4 R3.1
RX
  Top 0.406: U$2.3 55.59,17.2 56.6,18.2 56.6,48.6 59,51 59,67.4 58.88,67.52 U2.35
SPINDLE_17  (via drill 0.35)
  Top 0.406: v57.9,58.5 57.77,58.63 U2.28 | v54.5,46.7 54.4,46.6 JP2.1 | v74,60.2 73.6,60.2 71.7,62.1 66.6,62.1 66.2,62.5 66.2,65.8 65.5,66.5 65.5,68.4 65.3,68.6 65.3,83.7 67.9,86.3 80.4,86.3 81.2,87.1 94.1,87.1 | 94.1,87.1 95.2,88.2 95.2,93.2 95.9,93.9 SPINDLE.2 | SV1.3 95.1,68.84 v95.1,75.7 | v95.1,85.6 95.1,86.1 94.1,87.1
  Bottom 0.406: v54.5,46.7 56.7,48.9 56.7,56.5 57.9,57.7 v57.9,58.5 58.9,58.5 59.2,58.8 61.1,58.8 61.8,58.1 63.8,58.1 65.6,59.9 73.7,59.9 v74,60.2 | v95.1,75.7 v95.1,85.6
SPINDLE_EN_22  (via drill 0.35)
  Top 0.406: U2.36 58.21,68.79 v58.5,68.5 | v64.7,68 64.6,68.1 64.6,84 67.6,87 80,87 80.8,87.8 93.7,87.8 94.5,88.6 94.5,96.1 96.11,97.71 SPINDLE.3
  Bottom 0.406: v58.5,68.5 58.7,68.5 59.3,67.9 64.6,67.9 v64.7,68
TX  (via drill 0.35)
  Top 0.406: U$2.2 55.42,15.93 57.3,17.8 57.3,48.3 59.7,50.7 v59.7,66.3 | U2.34 58.05,66.25 v58.2,66.4
  Bottom 0.406: v59.7,66.3 58.3,66.3 v58.2,66.4
V3
  Top 0.508: U$2.4 54.56,18.46 55.1,19 C8.1
VUSB
  Top 1.27: D11.A 49.4,2 53.2,5.8 53.2,9.8 52.4,10.6 51.27,10.6 J1.VBUS
X_MIN_2  (via drill 0.35)
  Top 0.254: C22.2 v23.4,44.2 | D4.A R4.2 v18.5,44.2
  Top 0.305: C22.2 25.8,45.5 25.8,48.9 26.5,49.6 29,49.6 30.5,51.1 41.6,51.1 42,50.7 54.1,50.7 v54.2,50.6 | v54.5,52 54.72,52.22 U2.24
  Top 0.406: v54.2,50.6 54.8,50.6 55.2,50.2 55.2,41.9 52.7,39.4 v52.7,38.8
  Bottom 0.254: v23.4,44.2 v18.5,44.2
  Bottom 0.305: v54.5,52 54.6,51.9 54.6,51 v54.2,50.6
X_MIN_HV
  Top 0.406: XMN.1 4.51,22.51 6.8,24.8 6.8,43 8,44.2 D4.C
XDIR_26  (via drill 0.35)
  Top 0.406: PAD33.1 79.4,23.6 68.4,23.6 67.7,24.3 64.1,24.3 61.5,26.9 61.5,39.9 61.9,40.3 61.9,44.1 61.5,44.5 61.5,46.5 63.9,48.9 63.9,52 64.5,52.6 70.5,52.6 72.6,54.7 72.6,57.2 70.5,59.3 65.4,59.3 63.2,61.5 v63.2,65.1 | U2.11 41.63,58.63 41.9,58.9 52.6,58.9 53.7,60 53.7,63.41 v54.15,63.85
  Bottom 0.406: v54.15,63.85 55.19,64.9 63,64.9 v63.2,65.1
XSTEP_12  (via drill 0.35)
  Top 0.406: PAD35.1 89.4,23.6 80.5,23.6 79.8,24.3 68.8,24.3 68.1,25 64.5,25 62.2,27.3 62.2,39.6 62.6,40 62.6,44.4 62.2,44.8 62.2,46.2 64.6,48.6 64.6,51.6 64.9,51.9 70.8,51.9 73.3,54.4 73.3,57.5 70.8,60 65.7,60 63.9,61.8 63.9,62.4 v64,62.5 | U2.14 41.82,54.82 42.2,55.2 42.2,56 43.3,57.1 53.2,57.1 55.5,59.4 55.5,61.6 v55.9,62
  Bottom 0.406: v55.9,62 56.7,62.8 63.7,62.8 v64,62.5
Y_MIN_4  (via drill 0.35)
  Top 0.254: v23.4,48.2 C24.2 | D6.A R6.2 v18.5,48.2
  Top 0.305: C24.2 24.5,48.8 25.9,50.2 28.8,50.2 30.3,51.7 41.9,51.7 42.3,51.3 55.3,51.3 56,52 56,55.7 56.39,56.09 U2.26
  Bottom 0.254: v23.4,48.2 v18.5,48.2
Y_MIN_HV
  Top 0.406: D6.C 8.4,48.2 4.69,51.91 YMN.1
YDIR_25  (via drill 0.35)
  Top 0.406: PAD27.1 79.4,58.6 73.2,58.6 71.1,60.7 66,60.7 64.8,61.9 64.8,62.7 63.9,63.6 63.9,64.4 64.1,64.6 64.1,65.51 63.61,66 v63.2,66 | U2.10 43.2,59.9 43.6,59.5 52.4,59.5 53.1,60.2 53.1,64.03 v53.56,64.5
  Bottom 0.406: v53.56,64.5 54.66,65.6 62.4,65.6 62.8,66 v63.2,66
YSTEP_14  (via drill 0.35)
  Top 0.406: PAD29.1 89.4,58.6 80.4,58.6 79.7,59.3 73.5,59.3 71.4,61.4 66.3,61.4 65.5,62.2 65.5,63.2 v64.7,64 | U2.13 41.39,56.09 43,57.7 53,57.7 54.9,59.6 54.9,62.2 v55.3,62.6
  Bottom 0.406: v55.3,62.6 56.2,63.5 64.2,63.5 v64.7,64
Z_MIN_15  (via drill 0.35)
  Top 0.254: C28.2 v23.4,52.2
  Top 0.305: C28.2 25.9,50.8 28.6,50.8 30.1,52.3 42.2,52.3 42.6,51.9 53,51.9 53.45,52.34 U2.23
  Top 0.406: v18.6,52.2 R19.2 D8.A
  Bottom 0.254: v18.6,52.2 v23.4,52.2
Z_MIN_HV
  Top 0.406: D8.C 7.8,52.2 6.8,53.2 6.8,79.8 5.29,81.31 ZMN.1
ZDIR_33  (via drill 0.35)
  Top 0.406: PAD21.1 79.4,88.4 67,88.4 63.2,84.6 63.2,67.1 63.4,66.9 v63.35,66.85 | v53,65.2 52.5,64.7 52.5,60.4 52.2,60.1 44,60.1 42.93,61.17 U2.9
  Bottom 0.406: v63.35,66.85 63,67.2 57.8,67.2 56.9,66.3 54.1,66.3 v53,65.2
ZSTEP_27  (via drill 0.35)
  Top 0.406: v64.9,65.1 64.9,65.8 64.3,66.4 64.3,67.2 63.9,67.6 63.9,84.3 67.3,87.7 79.7,87.7 80.5,88.5 89.5,88.5 PAD23.1 | v54.7,63.2 54.3,62.8 54.3,59.8 52.8,58.3 42.7,58.3 41.76,57.36 U2.12
  Bottom 0.406: v54.7,63.2 55.7,64.2 63.6,64.2 64.5,65.1 v64.9,65.1

## Text on the board
Top: GRBL-ESP32 | CNC CONTROLLER | V1.0
tPlace: +24v- | TOOL | GND/PWM/DIR | A A B B | Z-MOTOR | 10U | - | + | PROBE | SIG/GND/VM | 10K | 0.1U | VM/GND/SIG | Z-END | 10U | 10U | M4 | 100K | 0.1U | 10K | 10K | 10K | SERVO | GND/5V/SIG | A A B B | Y-MOTOR | 10K | 10K | M4 | 10K | 0.1U | 3V3 | 10U | RELAY | GND | COOL | SPIND | GPIO | VM/GND/SIG | Y-END | M4 | 10K | 0.1U | 2019 | 21 | 1117-33 | 20 | M4 | 10K | 0.1U | 1K | 35/DOOR | 10K | 34/ABORT | 10U | GPIO | 10K | 39/START | 2N2222 | 2N2222 | 220U | A A B B | X-MOTOR | MBRA210LT3 | 36/HOLD | SS34 | 220U | 22P | 22P | GND | XL1509 | 18/SCK | 6.8uH | 12M | SPI | 19/MISO | 10U | 10U | www.facebook.com/beaufortwestcoza | 23/MOSI | 0.1U | CH340 | VM/GND/SIG | X-END | 100K | 0.1U | GPIO0 | M4 | M4 | 2N2222 | 1K | 220U | SW/C/SW | RELAY | RESET | POWER | + | RESET | MBRA210LT3
bPlace: Designed by | PvdWalt | B- | B+ | A- | A+ | 24V | GND | GND | EN | GND | DIR | GND | STEP | B- | B+ | A- | A+ | 24V | GND | GND | EN | GND | DIR | GND | STEP | B- | B+ | A- | A+ | 24V | GND | GND | EN | GND | DIR | GND | STEP
tStop: GRBL-ESP32 | CNC CONTROLLER | V1.0
PSU: 1206 footprint | jumper for programming mode, pullup resistor on gpio2 prevents install